# Altium PCB tinyfl_v3t.PcbDoc
Units mm, origin at the board's own origin, x right, y up, seen from the top; angles counter-clockwise.
Board outline 25 x 12.5 mm, 2 copper layers (Top Layer, Bottom Layer); 19 components, 12 nets, 47 pads, 5 vias.
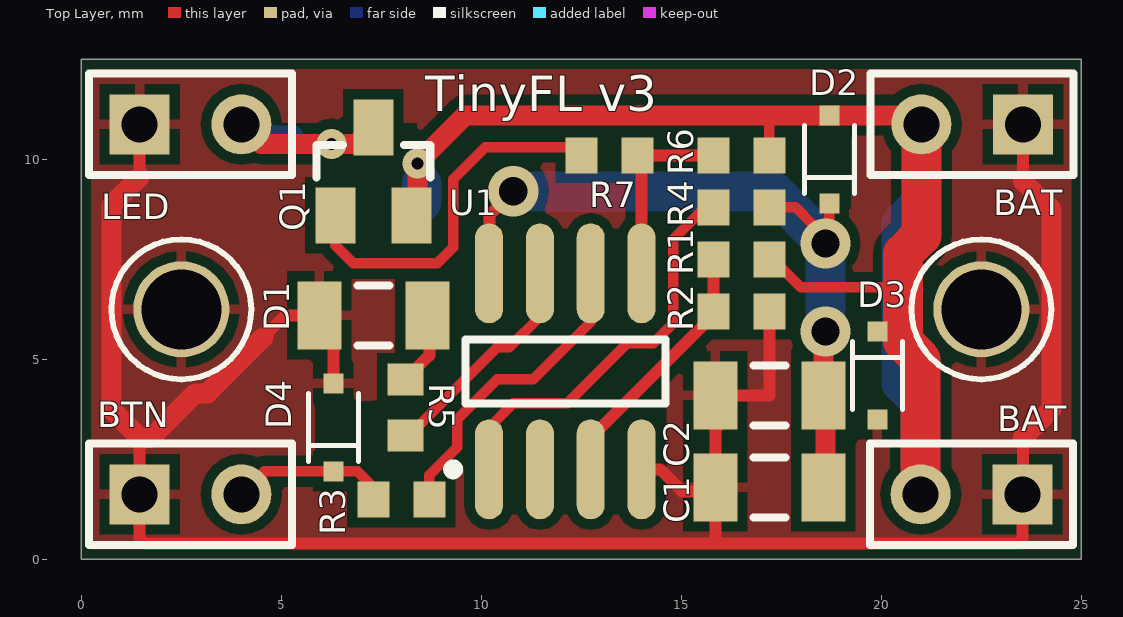
[diagram p0: Top Layer view]
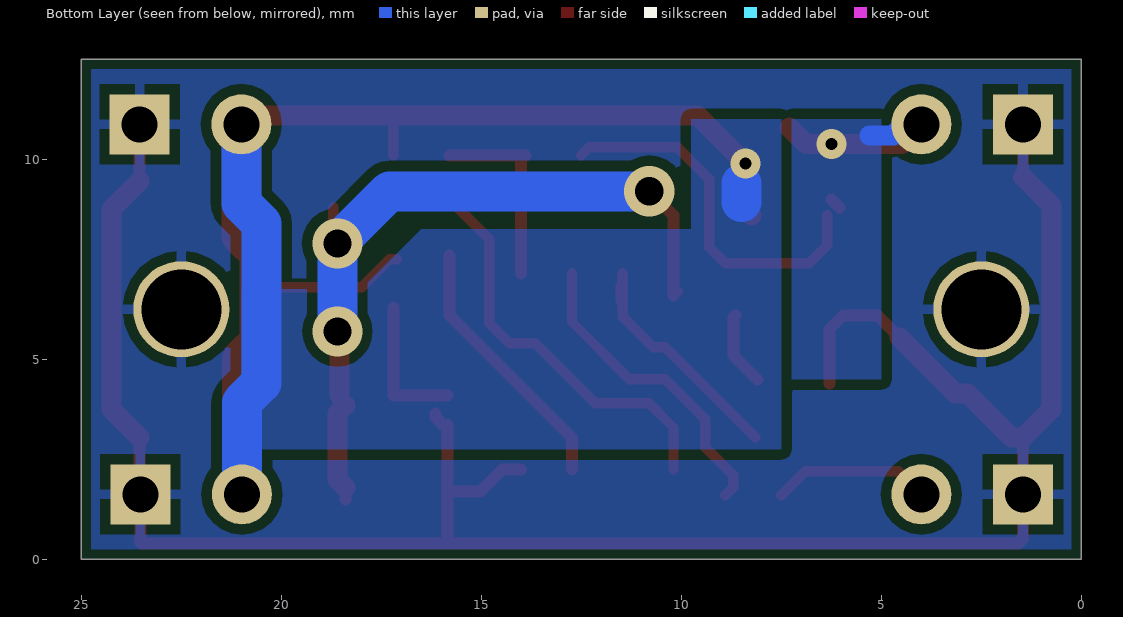
[diagram p1: Bottom Layer view, seen from below]

## Layer stack, top to bottom
Top Solder: solder mask 0.0102, Solder Resist, Dk 3.5
Top Layer: signal copper 0.0356
Dielectric 1: dielectric 0.32, FR-4, Dk 4.8
Bottom Layer: signal copper 0.0356
Bottom Solder: solder mask 0.0102, Solder Resist, Dk 3.5

## Board outline
0,12.5 0,0 25,0 25,12.5

## Design rules (kind name [scope] priority, off if disabled: settings)
Clearance [All] p1: gap=0.254 ignorepadtopadclearanceinfootprint=FALSE except(0: Arc-Hole Track-Hole SMDPad-Hole THPad-Hole Via-Hole Fill-Hole Poly-Hole Region-Hole Text-Hole)
PolygonConnect PolygonConnect_LOAD_P [InNet('LOAD_P')] p1: connectstyle=Direct reliefconductorwidth=0.254 reliefentries=4 polygonreliefangle="90 Angle" airgapwidth=0.254
PolygonConnect PolygonConnect_VIN [InNet('VIN')] p2: connectstyle=Direct reliefconductorwidth=0.254 reliefentries=4 polygonreliefangle="90 Angle" airgapwidth=0.254
PolygonConnect PolygonConnect_1 [All] p3: connectstyle=Relief reliefconductorwidth=0.254 reliefentries=4 polygonreliefangle="90 Angle" airgapwidth=0.254
RoutingVias [All] p1: holewidth=0.3 width=0.75 viastyle="Through Hole" minholewidth=0.3 minwidth=0.75 maxholewidth=0.711 maxwidth=1.27
SolderMaskExpansion [All] p1: expansion=0.025
Width [All] p1: maxlimit=1 minlimit=0.254 preferedwidth=0.254
30 further rules are at their usual default settings.

## Classes and differential pairs
component class tinyfl_tsw: BTN C1 C2 D1 D2 D3 D4 Q1 R1 R2 R3 R4 R5 R6 R7 U1 ""

## Components (designator, comment, footprint, x,y, rotation, side; value= is the part's Value field where it differs from the comment)
BAT "JACK_BAT1" HDR1X2 23.525,1.625 r180 top (schematic designator P3)
BAT "JACK_BAT2" HDR1X2 23.54,10.875 r180 top (schematic designator P4)
BTN "JACK_BTN" HDR1X2 1.46,1.625 r0 top (schematic designator P1)
C1 "1206" C1206 17.2,1.8 r180 top value=100nF
C2 "1206" C1206 17.2,4.1 r180 top value=10uF
D1 "1206" C1206 7.3,6.1 r180 top
D2 "BAT60" *SOD323(F) 18.7,10 r270 top
D3 "PESD5V0" SOD-323 19.9,4.6 r90 top
D4 "PESD5V0" SOD-323 6.3,3.3 r270 top
LED "JACK_LED1" HDR1X2 1.46,10.875 r0 top (schematic designator P2)
Q1 "SI2323" SOT23 7.3,9.7 r0 top
R1 "0603" 1608[0603] 16.5,7.5 r180 top value=750K
R2 "0603" 1608[0603] 16.5,6.2 r0 top value=220K
R3 "0603" 1608[0603] 8,1.5 r180 top value=330
R4 "0603" 1608[0603] 16.5,8.8 r0 top value=10K
R5 "0603" 1608[0603] 8.1,3.8 r270 top value=330
R6 "0603" 1608[0603] 16.5,10.1 r0 top value=25K
R7 "0603" 1608[0603] 13.2,10.1 r180 top value=100
U1 "ATtiny13A-SSU" 8S1_M 12.1,4.7 r90 top

## Footprints (in the part's own frame and the unit in brackets; to place one, negate y for a bottom-side part, rotate by r counter-clockwise, add the part's x,y. Pads: shape width x height; smd on the part's side, far side on the other; paste and mask are expansions set on the pad)
8S1_M [mm] "SOIC, 8-Leads, Body 4.9x3.9mm, Pitch 1.27mm, IPC Low Density"
  oval 2.5x0.7 smd: 1(-2.45,1.905) 2(-2.45,0.635) 3(-2.45,-0.635) 4(-2.45,-1.905) 5(2.45,-1.905) 6(2.45,-0.635) 7(2.45,0.635) 8(2.45,1.905)
  silkscreen extent -2.57,-2.5 0.8,2.93, body extent -2,-2.5 2,2.5, height 1.75
1608[0603] [mm] "Chip Capacitor, Body 1.6x0.8mm, IPC High Density"
  rect 0.8x0.9 smd: 1(-0.7,0) 2(0.7,0)
  body extent -0.87,-0.48 0.87,0.48, height 1.3
*SOD323(F) [mm]
  rect 0.5x0.5 smd: 1(1.1,0) 2(-1.1,0)
  silkscreen extent -0.85,-0.63 0.85,0.63, body extent -0.86,-0.64 0.86,0.64, height 1.11
C1206 [mm] "Chip Capacitor, Body 3.2x1.6mm, IPC High Density"
  rect 1.1x1.7 smd: 1(-1.35,0) 2(1.35,0)
  silkscreen extent -0.4,-0.75 0.4,0.75, body extent -1.7,-0.9 1.7,0.9, height 1.3
HDR1X2 [mm] "Connector; Header; 2 Position"
  rect 1.5x1.5 hole 0.9: 1(0,0)
  round 1.5 hole 0.9: 2(2.54,0)
  silkscreen extent -1.27,-1.27 3.81,1.27
SOD-323 [mm]
  rect 0.5x0.5 smd: 1(1.1,0) 2(-1.1,0)
  silkscreen extent -0.85,-0.63 0.85,0.63, body extent -0.86,-0.64 0.86,0.64, height 1.11
SOT23 [mm]
  rect 1x1.4 smd: 1(-0.95,-1.1) 2(0.95,-1.1) 3(0,1.1)
  silkscreen extent -1.42,-0.15 1.42,0.66, body extent -1.45,-0.6 1.45,0.7, height 1.06

## Part data
BAT BAT BTN LED: library part "Header 2", "Header, 2-Pin", LatestRevisionDate=17-Jul-2002, LatestRevisionNote="Re-released for DXP Platform.", Publisher="Altium Limited"
C1 C2: library part Cap, "Capacitor", LatestRevisionDate=17-Jul-2002, LatestRevisionNote="Re-released for DXP Platform.", PackageDescription="Radial Cap, Thru-Hole; 2 Leads; 0.3 in Pin Spacing", PackageReference=RAD-0.3, Published=8-Jun-2000, Publisher="Altium Limited"
D1: library part LED2, "Typical RED, GREEN, YELLOW, AMBER GaAs LED", LatestRevisionDate=17-Jul-2002, LatestRevisionNote="Re-released for DXP Platform.", PackageDescription="SM LED; 2 Flat Leads", PackageReference=3.2X1.6X1.1, PackageVersion=Feb-2002, Published=8-Jun-2000, Publisher="Altium Limited"
D2: library part BAS316,135, "Diode Switching 100V 0.25A 2-Pin SOD-323 T/R", Package="SOD-323 NXP Semiconductors", Availability=Unavailable, MF="Nexperia USA", MP=BAS316,135, Price=None, SnapEDA_Link=https://www.snapeda.com/parts/BAS316%2C135/Nexperia%20USA%20Inc./view-part/?ref=snap
Q1: library part AO3401, "P-CH SOT-23 Mosfet", Package="SOT-23-3 Vishay", Availability=Unavailable, MP=AO3401
R1 R2 R3 R4 R5 R6 R7: library part Res2, "Resistor", LatestRevisionDate=17-Jul-2002, LatestRevisionNote="Re-released for DXP Platform.", PackageDescription="Axial Device, Thru-Hole; 2 Leads; 0.4 in Pin Spacing", PackageReference=AXIAL-0.4, Published=8-Jun-2000, Publisher="Altium Limited"
U1: "8-bit AVR Microcontroller, 1.8-5.5V, 1KB Flash, 64 Bytes EEPROM, 64 Bytes SRAM, 8-pin SOIC, Industrial Grade (-40°C to 85°C), Pb-Free", Supplier Part Number 1=ATTINY13A-SSU-ND, Code_IPC=SOIC127P600-8, Code_JEDEC=MS-012-AA, ComponentLink1Description="Manufacturer Link", ComponentLink1URL=http://www.atmel.com/products/avr/default.asp?, ComponentLink2Description="ATtiny13A Datasheet", ComponentLink2URL=http://www.atmel.com/dyn/resources/prod_documents/doc8126.pdf, ComponentLink3Description="ATtiny13A Summary", ComponentLink3URL=http://www.atmel.com/dyn/resources/prod_documents/8126S.pdf, ComponentLink4Description="Atmel.com Home", ComponentLink4URL=http://www.atmel.com, DatasheetVersion="revD, Nov-2009", PackageDescription="8-Lead (0.150\" Wide Body), Plastic Gull Wing Small Outline (JEDEC SOIC)", PackageReference=8S1, PackageVersion="revC, Mar-2005", Published=1-Apr-2010, Publisher="Altium Limited", Supplier 1=Digi-Key, Supplier 2=Farnell, Supplier 3=Mouser, Supplier Part Number 2=1704567, Supplier Part Number 3=556-ATTINY13A-SSU

## Free pads (board coordinates)
  round 2.4 hole 2: 1(2.5,6.25) 1(22.5,6.25)

## Via types
v1: diameter 1.25, hole 0.7, Top Layer to Bottom Layer, tented both sides, 2 vias
v2: diameter 0.75, hole 0.3, Top Layer to Bottom Layer, tented both sides, 2 vias
v3: diameter 1.27, hole 0.711, Top Layer to Bottom Layer, tented both sides, 1 vias

## Nets (pads, with @x,y where several pads share a name; then routed paths per layer and width w, separated by ;. In a path a pad name is that pad's centre, name@x,y a point inside that pad or via, vN(x,y) a via of type N, cw(c..) or ccw(c..) an arc to the next point about the centre after c; other vN are vias at no path point)
GND: BAT.1 BTN.1 C1.2 C2.2 D1.2 D3.2 D4.2 LED.1 pad.1 R2.2 U1.4 | length 61.5
  Top Layer w0.3: 1.46,3.04 BTN.1 1.46,0.51 1.57,0.4 23.5,0.4 23.525,0.425 BAT.1@23.525,1.625 ; 1.46,9.56 LED.1 LED.1@1.46,11 ; 4.55,5.55 5.1,6.1 D1.2 6.3,5.75 D4.2 ; U1.4 14.469,2.25 15.019,1.7 C1.2@15.85,1.7 ; 15.85,0.4 C1.2@15.85,1.7 ; C2.2 17.2,4.1 R2.2 R2.2@17.2,6.3 ; C2.2@16.146,3.646 16.146,3.55 15.9,3.304 15.85,3.354 C1.2 C1.2@15.85,1.7 ; BAT.1@23.54,1.5 23.54,3.04 ; 23.54,9.46 BAT.1@23.54,10.875
  Top Layer w0.5: 1.4,3.1 0.75,3.75 0.75,8.85 1.46,9.56 ; 1.46,3.04 1.74,3.04 2.85,4.15 3.15,4.15 4.55,5.55 ; 23.54,3.04 24.25,3.75 24.25,8.75 23.54,9.46
  Bottom Layer w0.3: LED.1 LED.1@1.46,11 ; pad.1@2.45,6.3 pad.1@2.5,6.25 ; BAT.1@23.44,1.6 23.525,1.515 BAT.1@23.525,1.625 ; BAT.1@23.54,10.875 BAT.1@23.54,11
LOAD_P: LED.2 Q1.3 | length 5.1
  Top Layer w0.5: LED.2 4.489,10.386 v2(6.25,10.386) 6.886,10.386 Q1.3
  Bottom Layer w0.5: LED.2 4.425,10.875 4.7,10.6 5.3,10.6
NetD1_1: D1.1 R5.1 | length 1.9
  Top Layer w0.3: R5.1 8.7,5.1 8.7,6.05 D1.1
NetD4_1: BTN.2 D4.1 R3.2 | length 4.7
  Top Layer w0.254: BTN.2 4.575,2.2 D4.1 6.9,2.2 R3.2@7.5,1.6
  Top Layer w0.3: BTN.2@4,1.5 BTN.2@4.5,2
NetQ1_1: Q1.1 R7.2 | length 9.6
  Top Layer w0.254: Q1.1 6.35,7.85 6.8,7.4 8.9,7.4 9.3,7.8 9.3,9.5 10.1,10.3 12.3,10.3 R7.2
  Top Layer w0.3: Q1.1@6.05,8.8 Q1.1@6.25,9
NetR1_2: R1.2 R2.1 U1.3 | length 6.6
  Top Layer w0.3: U1.3 12.735,3.035 15.8,6.1 R2.1 R1.2@15.8,7.6
NetR3_1: R3.1 U1.6 | length 7.8
  Top Layer w0.254: R3.1@8.9,1.6 8.7,1.8 8.7,2.1 9.4,2.8 9.4,3.5 10.4,4.5 11.3,4.5 12.735,5.935 U1.6
NetR4_1: R4.1 U1.1 | length 10.2
  Top Layer w0.254: U1.1 10.195,3.295 10.8,3.9 12.15,3.9 13.65,5.4 14.3,5.4 14.8,5.9 14.8,8 R4.1@15.75,8.95
NetR5_2: R5.2 U1.7 | length 6
  Top Layer w0.254: R5.2@8.15,3.05 10.4,5.3 10.7,5.3 11.465,6.065 U1.7
  Top Layer w0.3: U1.7@11.5,6.489 U1.7@11.5,6.815
NetR6_1: R6.1 R7.1 U1.5 | length 4.8
  Top Layer w0.3: R7.1 R6.1 ; U1.5 R7.1@14.005,10.1
VCC: C1.1 C2.1 D2.1 R4.2 U1.8 | length 20.5
  Top Layer w0.254: U1.8@10.09,6.7 U1.8@10.195,6.595 ; R4.2 17.858,8.8 18.3,8.358 18.3,7.9 18.7,8.3 D2.1@18.7,8.8
  Top Layer w0.3: U1.8@10.195,6.595 U1.8 10.2,7.155 10.2,8.6 v3(10.8,9.2) ; C1.1@18.4,1.5 C1.1@18.4,1.8
  Top Layer w0.5: C1.1@18.4,1.8 18.6,2 18.6,3.65 C2.1@18.4,3.85 ; v1@18.4,5.7 18.55,5.55 C2.1
  Bottom Layer w1: v3(10.8,9.2) 17.3,9.2 v1(18.6,7.9) v1(18.6,5.7)
VIN: BAT.2 D2.2 D3.1 Q1.2 R1.1 R6.2 | length 40.3
  Top Layer w0.254: R1.1@17.111,7.5 R1.1 17.289,7.5 17.989,6.8 20.546,6.8 ; R6.2 17.2,11.1 ; 20.492,7.7 20.546,7.646
  Top Layer w0.3: 20.65,9 21,8.65
  Top Layer w0.5: Q1.2 8.4,8.75 v2(8.4,9.9) 9.6,11.1 17.2,11.1 D2.2 20.775,11.1 BAT.2@20.937,10.937 ; BAT.2@20.796,10.796 BAT.2@20.937,10.937 ; BAT.2@21,10.875 BAT.2@20.937,10.937 ; BAT.2@21,11 BAT.2@20.937,10.937
  Top Layer w1: BAT.2@20.985,1.625 20.985,5.002 20.546,5.441 20.546,6.8 20.546,7.646 21,8.1 21,8.65 BAT.2@21,10.875
  Bottom Layer w0.5: BAT.2@20.6,1.9 BAT.2@20.9,1.6
  Bottom Layer w1: 8.5,8.936 8.5,9.4 ; BAT.2@20.985,1.625 20.985,3.926 20.5,4.411 20.5,8.4 21,8.9 BAT.2@21,10.875
pads on no net: U1.2

## Polygon pours and split planes (outlines as drawn)
GND on Bottom Layer "BOT_POLY" (solid, pour order 44): 0.25,12.25 0.25,0.25 24.75,0.25 24.75,12.25
VIN on Bottom Layer "Bot_Poly_VIN" (solid, pour order 30): 7.5,11 7.5,2.75 20.985,2.75 20.985,6.75 18,6.75 16.5,8.25 9.75,8.25 9.75,11
LOAD_P on Bottom Layer "Bot_Poly_LOAD_P" (solid, pour order 32): 5,11 5,9.75 5,4.5 7.25,4.5 7.25,11
GND on Top Layer "TOP_POLY" (solid, pour order 46): 0.25,12.25 0.25,0.25 24.75,0.25 24.75,12.25

## Other copper
Top Layer:
  pour cut-out: 5.818,3.874 5.842,3.85 5.842,2.2 8.6,2.2 8.7,2.1 8.7,3.874 8.89,4.064
  pour cut-out: 17.854,10.586 17.854,8.804 17.908,8.75 19.25,8.75 19.25,10.54 19.204,10.586
  pour cut-out: 9.6,8.005 9.6,2 14.498,2 14.621,2.123 14.621,8.05
  pour cut-out: 5.893,10.907 5.842,8.128 8.5,8.3 8.382,10.907

## Silkscreen, mask and mechanical layers (free items; w line width, h text height)
Top Overlay:
  circle w0.15: c2.5,6.25 r1.75
  circle w0.15: c22.5,6.25 r1.75
  text "TinyFL v3" at 8.6,11.2 h0.89
Mechanical 1:
  the board outline again, w0.5